# EAGLE board Jst_conv (EAGLE 9.6.2), part 1 of 2
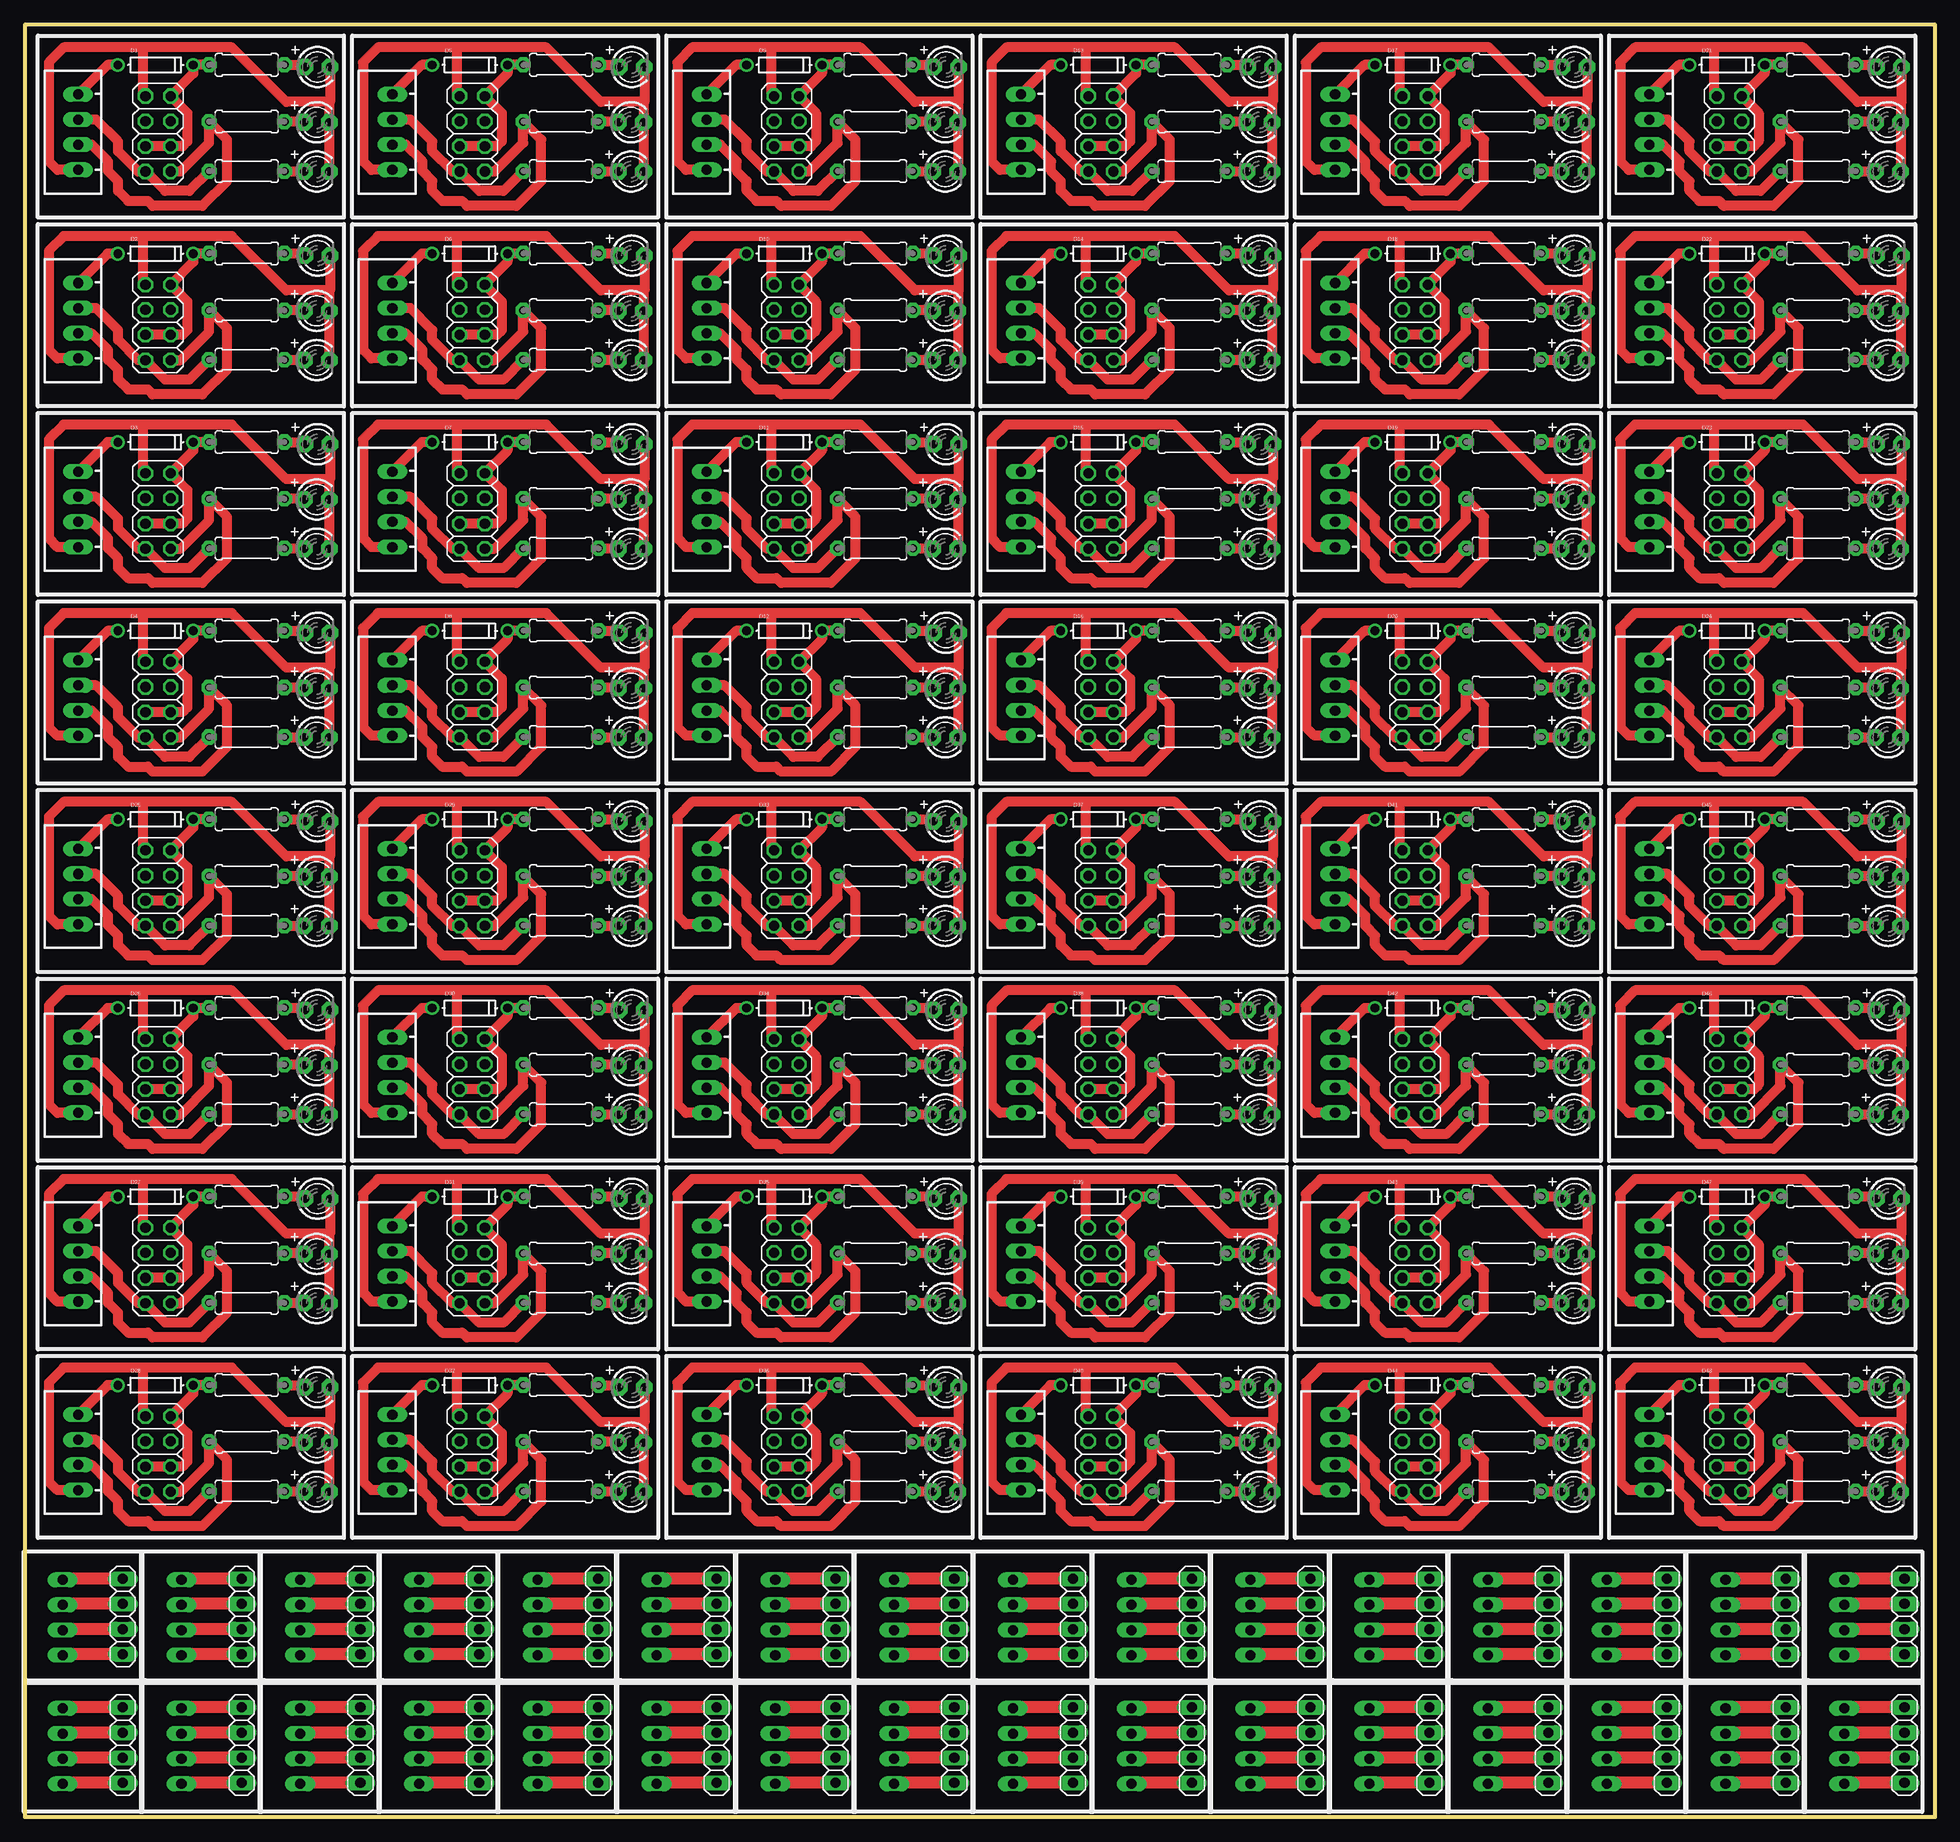
[diagram p0: board, top side]
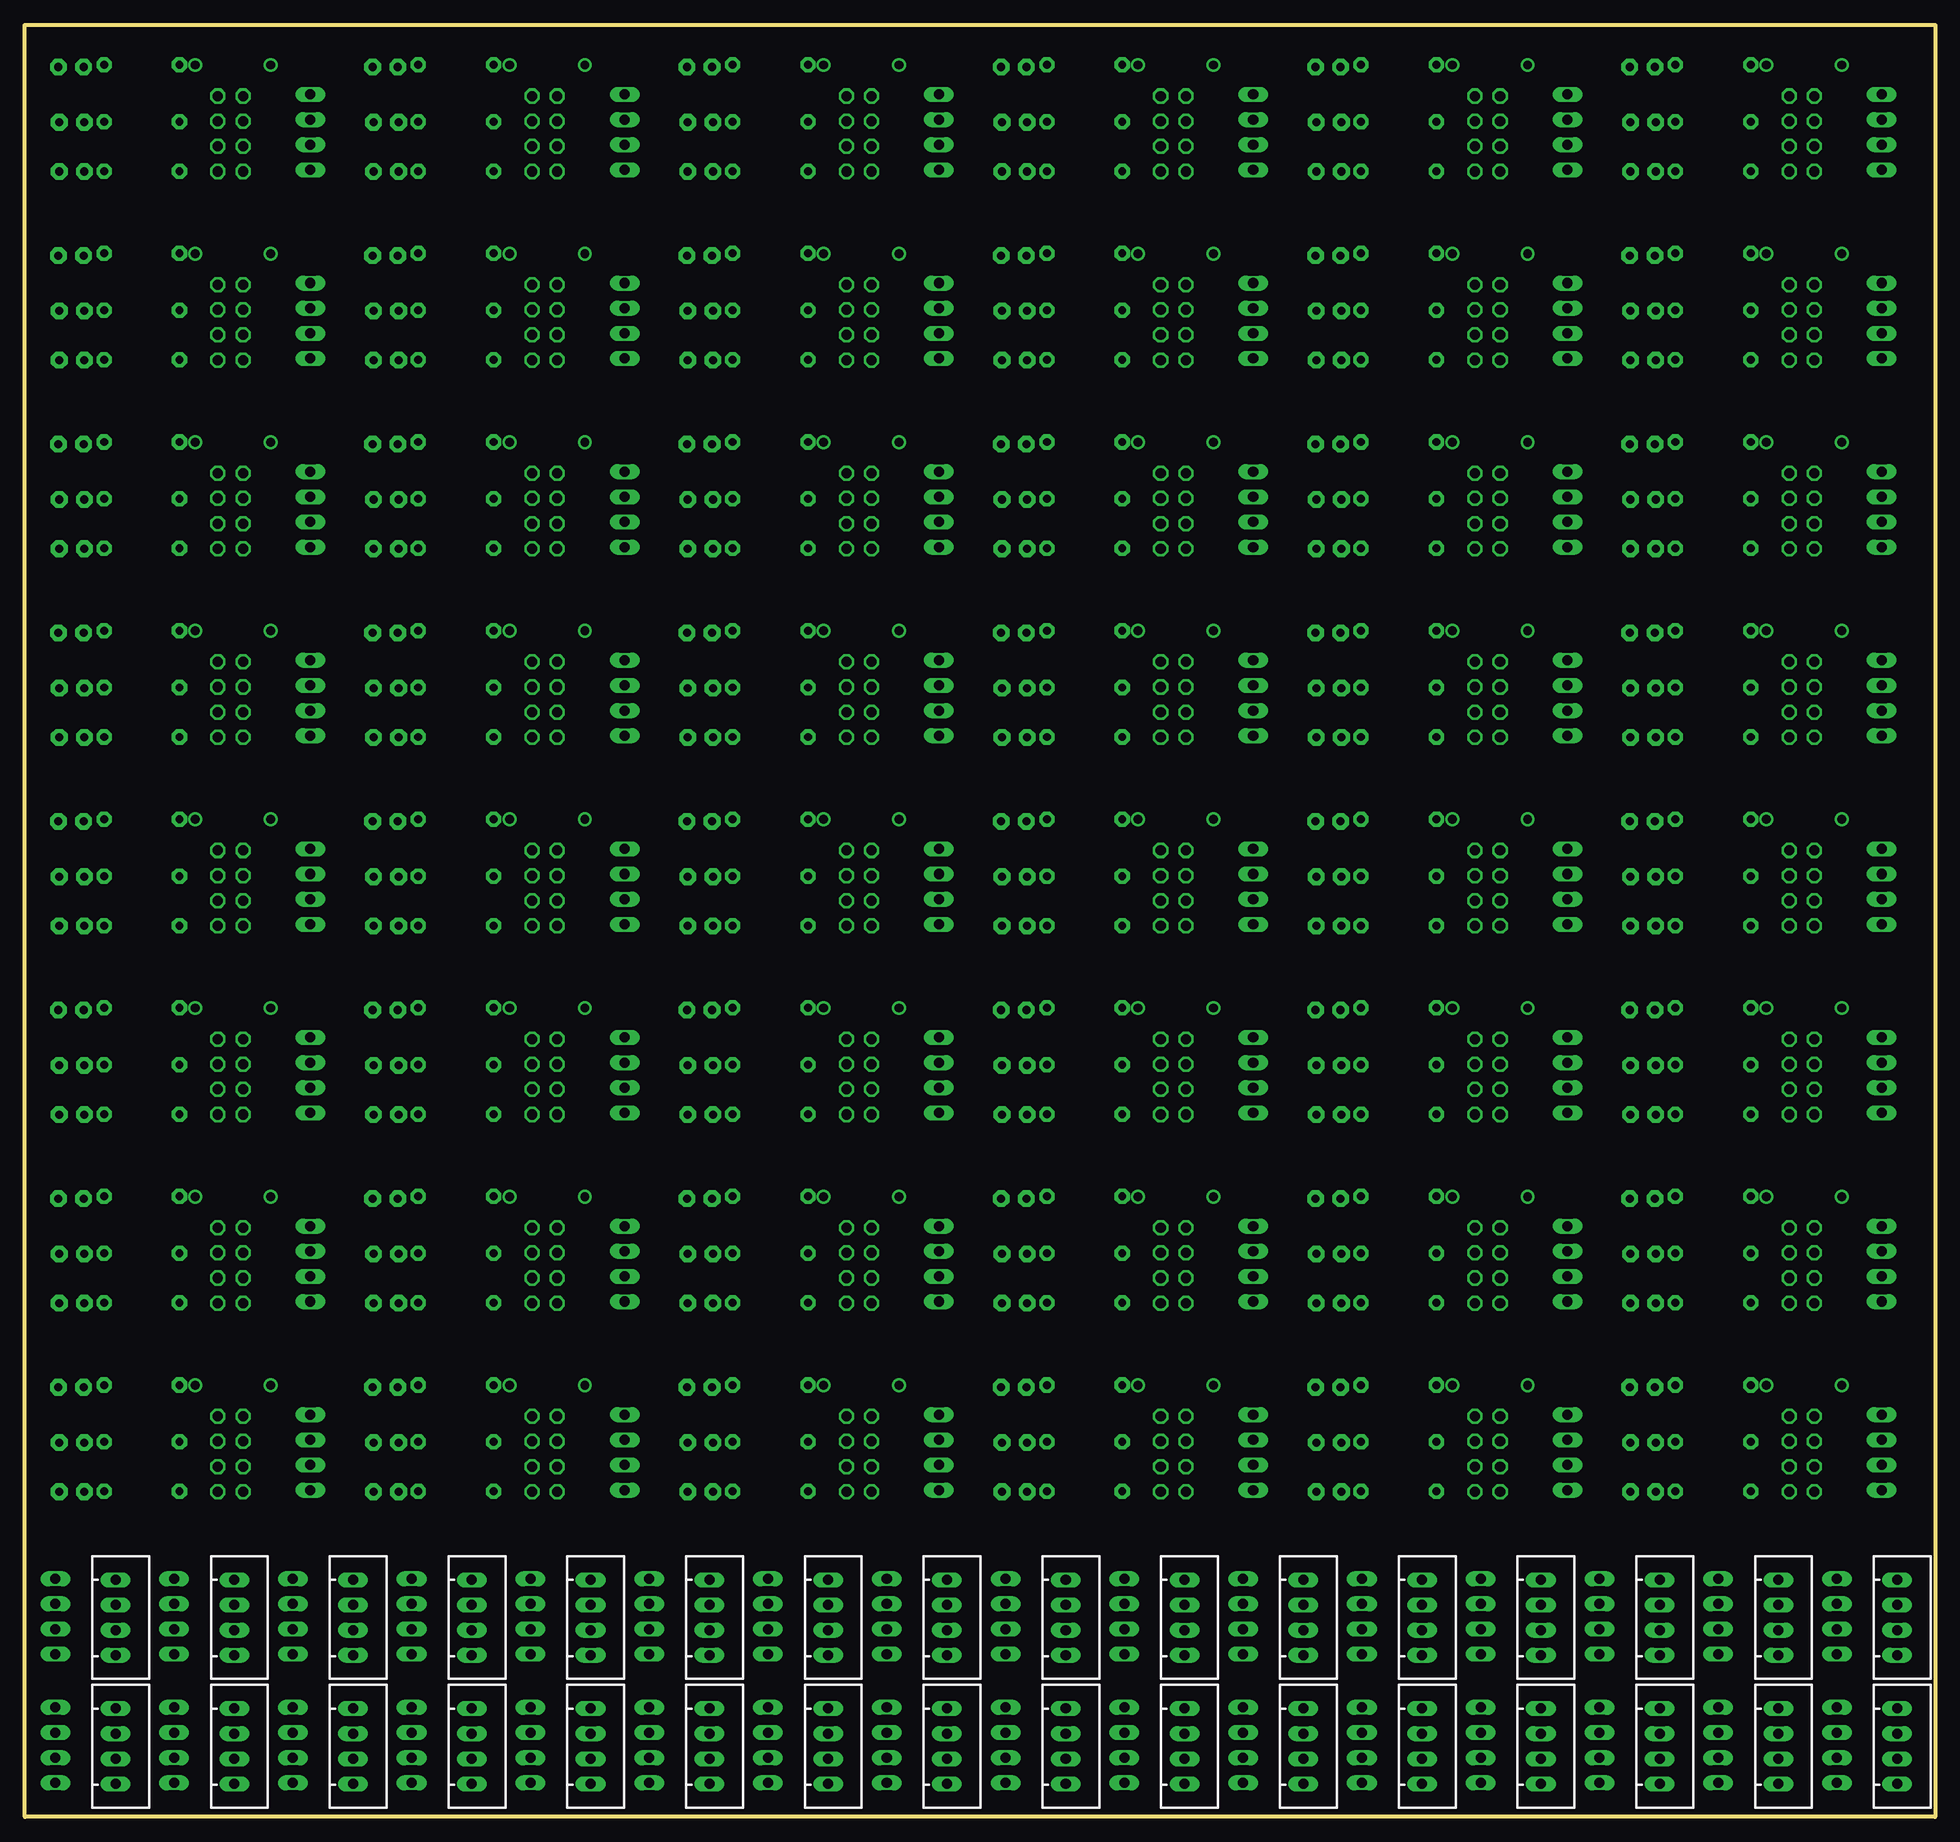
[diagram p1: board, bottom side, seen from below]

Size 193 x 181 mm. Coordinates in mm from the lower left corner, seen from the top.
Outline: 0,181 0,0 193,0 193,181 0,181
Copper layers (1*16): Top 0.035mm / dielectric 1.5mm / Bottom 0.035mm
Design rules "default": minimum track width 6mil, minimum drill 0.35mm, track to track 6mil, track to pad 6mil, pad to pad 6mil, via to via 6mil, smd to smd 6mil, copper to edge 40mil, drill to drill 6mil, minimum pad ring 10mil, minimum via ring 8mil, stop-mask expansion 4mil, vias tented up to drill 0mil, thermal gap 10mil

## Footprints (pad centres in the part's own frame; a part is rotated, then mirrored left to right if it is on the bottom)
DO-1N4148 = drill 0.9: A -3.81,0; C 3.81,0
2X04 = drill 1.016 octagon: 1 -3.81,-1.27; 2 -3.81,1.27; 3 -1.27,-1.27; 4 -1.27,1.27; 5 1.27,-1.27; 6 1.27,1.27; 7 3.81,-1.27; 8 3.81,1.27
1X04 = drill 1.016 long: 1 -3.81,0; 2 -1.27,0; 3 1.27,0; 4 3.81,0
LED3MM = drill 0.813 pad 1.676 octagon: A -1.27,0; K 1.27,0
0207/7 = drill 0.8 pad 1.524 octagon: 1 -3.81,0; 2 3.81,0
JST-XH-04-PACKAGE-LONG-PAD = drill 1.016 long: 1 -3.81,0; 2 -1.27,0; 3 1.27,0; 4 3.81,0

## Placement (x,y rotation side)
D1  [DO-1N4148]  13.22,176.94 0 top
D2  [DO-1N4148]  13.22,157.89 0 top
D3  [DO-1N4148]  13.22,138.84 0 top
D4  [DO-1N4148]  13.22,119.79 0 top
D5  [DO-1N4148]  44.97,176.94 0 top
D6  [DO-1N4148]  44.97,157.89 0 top
D7  [DO-1N4148]  44.97,138.84 0 top
D8  [DO-1N4148]  44.97,119.79 0 top
D9  [DO-1N4148]  76.72,176.94 0 top
D10  [DO-1N4148]  76.72,157.89 0 top
D11  [DO-1N4148]  76.72,138.84 0 top
D12  [DO-1N4148]  76.72,119.79 0 top
D13  [DO-1N4148]  108.47,176.94 0 top
D14  [DO-1N4148]  108.47,157.89 0 top
D15  [DO-1N4148]  108.47,138.84 0 top
D16  [DO-1N4148]  108.47,119.79 0 top
D17  [DO-1N4148]  140.22,176.94 0 top
D18  [DO-1N4148]  140.22,157.89 0 top
D19  [DO-1N4148]  140.22,138.84 0 top
D20  [DO-1N4148]  140.22,119.79 0 top
D21  [DO-1N4148]  171.97,176.94 0 top
D22  [DO-1N4148]  171.97,157.89 0 top
D23  [DO-1N4148]  171.97,138.84 0 top
D24  [DO-1N4148]  171.97,119.79 0 top
D25  [DO-1N4148]  13.22,100.74 0 top
D26  [DO-1N4148]  13.22,81.69 0 top
D27  [DO-1N4148]  13.22,62.64 0 top
D28  [DO-1N4148]  13.22,43.59 0 top
D29  [DO-1N4148]  44.97,100.74 0 top
D30  [DO-1N4148]  44.97,81.69 0 top
D31  [DO-1N4148]  44.97,62.64 0 top
D32  [DO-1N4148]  44.97,43.59 0 top
D33  [DO-1N4148]  76.72,100.74 0 top
D34  [DO-1N4148]  76.72,81.69 0 top
D35  [DO-1N4148]  76.72,62.64 0 top
D36  [DO-1N4148]  76.72,43.59 0 top
D37  [DO-1N4148]  108.47,100.74 0 top
D38  [DO-1N4148]  108.47,81.69 0 top
D39  [DO-1N4148]  108.47,62.64 0 top
D40  [DO-1N4148]  108.47,43.59 0 top
D41  [DO-1N4148]  140.22,100.74 0 top
D42  [DO-1N4148]  140.22,81.69 0 top
D43  [DO-1N4148]  140.22,62.64 0 top
D44  [DO-1N4148]  140.22,43.59 0 top
D45  [DO-1N4148]  171.97,100.74 0 top
D46  [DO-1N4148]  171.97,81.69 0 top
D47  [DO-1N4148]  171.97,62.64 0 top
D48  [DO-1N4148]  171.97,43.59 0 top
JP1  [2X04]  13.47,169.99 270 top
JP2  [2X04]  13.47,150.94 270 top
JP3  [2X04]  13.47,131.89 270 top
JP4  [2X04]  13.47,112.84 270 top
JP5  [2X04]  45.22,169.99 270 top
JP6  [2X04]  45.22,150.94 270 top
JP7  [2X04]  45.22,131.89 270 top
JP8  [2X04]  45.22,112.84 270 top
JP9  [2X04]  76.97,169.99 270 top
JP10  [2X04]  76.97,150.94 270 top
JP11  [2X04]  76.97,131.89 270 top
JP12  [2X04]  76.97,112.84 270 top
JP13  [2X04]  108.72,169.99 270 top
JP14  [2X04]  108.72,150.94 270 top
JP15  [2X04]  108.72,131.89 270 top
JP16  [2X04]  108.72,112.84 270 top
JP17  [2X04]  140.47,169.99 270 top
JP18  [2X04]  140.47,150.94 270 top
JP19  [2X04]  140.47,131.89 270 top
JP20  [2X04]  140.47,112.84 270 top
JP21  [2X04]  172.22,169.99 270 top
JP22  [2X04]  172.22,150.94 270 top
JP23  [2X04]  172.22,131.89 270 top
JP24  [2X04]  172.22,112.84 270 top
JP25  [2X04]  13.47,93.79 270 top
JP26  [2X04]  13.47,74.74 270 top
JP27  [2X04]  13.47,55.69 270 top
JP28  [2X04]  13.47,36.64 270 top
JP29  [2X04]  45.22,93.79 270 top
JP30  [2X04]  45.22,74.74 270 top
JP31  [2X04]  45.22,55.69 270 top
JP32  [2X04]  45.22,36.64 270 top
JP33  [2X04]  76.97,93.79 270 top
JP34  [2X04]  76.97,74.74 270 top
JP35  [2X04]  76.97,55.69 270 top
JP36  [2X04]  76.97,36.64 270 top
JP37  [2X04]  108.72,93.79 270 top
JP38  [2X04]  108.72,74.74 270 top
JP39  [2X04]  108.72,55.69 270 top
JP40  [2X04]  108.72,36.64 270 top
JP41  [2X04]  140.47,93.79 270 top
JP42  [2X04]  140.47,74.74 270 top
JP43  [2X04]  140.47,55.69 270 top
JP44  [2X04]  140.47,36.64 270 top
JP45  [2X04]  172.22,93.79 270 top
JP46  [2X04]  172.22,74.74 270 top
JP47  [2X04]  172.22,55.69 270 top
JP48  [2X04]  172.22,36.64 270 top
JP49  [1X04]  9.91,20.23 270 top
JP50  [1X04]  21.91,20.23 270 top
JP51  [1X04]  33.91,20.23 270 top
JP52  [1X04]  45.91,20.23 270 top
JP53  [1X04]  9.91,7.23 270 top
JP54  [1X04]  21.91,7.23 270 top
JP55  [1X04]  33.91,7.23 270 top
JP56  [1X04]  45.91,7.23 270 top
JP57  [1X04]  57.91,20.23 270 top
JP58  [1X04]  69.91,20.23 270 top
JP59  [1X04]  81.91,20.23 270 top
JP60  [1X04]  93.91,20.23 270 top
JP61  [1X04]  57.91,7.23 270 top
JP62  [1X04]  69.91,7.23 270 top
JP63  [1X04]  81.91,7.23 270 top
JP64  [1X04]  93.91,7.23 270 top
JP65  [1X04]  105.91,20.23 270 top
JP66  [1X04]  117.91,20.23 270 top
JP67  [1X04]  129.91,20.23 270 top
JP68  [1X04]  141.91,20.23 270 top
JP69  [1X04]  105.91,7.23 270 top
JP70  [1X04]  117.91,7.23 270 top
JP71  [1X04]  129.91,7.23 270 top
JP72  [1X04]  141.91,7.23 270 top
JP73  [1X04]  153.91,20.23 270 top
JP74  [1X04]  165.91,20.23 270 top
JP75  [1X04]  177.91,20.23 270 top
JP76  [1X04]  189.91,20.23 270 top
JP77  [1X04]  153.91,7.23 270 top
JP78  [1X04]  165.91,7.23 270 top
JP79  [1X04]  177.91,7.23 270 top
JP80  [1X04]  189.91,7.23 270 top
LED1  [LED3MM]  29.5,171.15 0 top
LED2  [LED3MM]  29.5,166.18 0 top
LED3  [LED3MM]  29.58,176.74 0 top
LED4  [LED3MM]  29.5,152.1 0 top
LED5  [LED3MM]  29.5,147.13 0 top
LED6  [LED3MM]  29.58,157.69 0 top
LED7  [LED3MM]  29.5,133.05 0 top
LED8  [LED3MM]  29.5,128.08 0 top
LED9  [LED3MM]  29.58,138.63 0 top
LED10  [LED3MM]  29.5,114 0 top
LED11  [LED3MM]  29.5,109.03 0 top
LED12  [LED3MM]  29.58,119.59 0 top
LED13  [LED3MM]  61.25,171.15 0 top
LED14  [LED3MM]  61.25,166.18 0 top
LED15  [LED3MM]  61.33,176.74 0 top
LED16  [LED3MM]  61.25,152.1 0 top
LED17  [LED3MM]  61.25,147.13 0 top
LED18  [LED3MM]  61.33,157.69 0 top
LED19  [LED3MM]  61.25,133.05 0 top
LED20  [LED3MM]  61.25,128.08 0 top
LED21  [LED3MM]  61.33,138.63 0 top
LED22  [LED3MM]  61.25,114 0 top
LED23  [LED3MM]  61.25,109.03 0 top
LED24  [LED3MM]  61.33,119.59 0 top
LED25  [LED3MM]  93,171.15 0 top
LED26  [LED3MM]  93,166.18 0 top
LED27  [LED3MM]  93.08,176.74 0 top
LED28  [LED3MM]  93,152.1 0 top
LED29  [LED3MM]  93,147.13 0 top
LED30  [LED3MM]  93.08,157.69 0 top
LED31  [LED3MM]  93,133.05 0 top
LED32  [LED3MM]  93,128.08 0 top
LED33  [LED3MM]  93.08,138.63 0 top
LED34  [LED3MM]  93,114 0 top
LED35  [LED3MM]  93,109.03 0 top
LED36  [LED3MM]  93.08,119.59 0 top
LED37  [LED3MM]  124.75,171.15 0 top
LED38  [LED3MM]  124.75,166.18 0 top
LED39  [LED3MM]  124.83,176.74 0 top
LED40  [LED3MM]  124.75,152.1 0 top
LED41  [LED3MM]  124.75,147.13 0 top
LED42  [LED3MM]  124.83,157.69 0 top
LED43  [LED3MM]  124.75,133.05 0 top
LED44  [LED3MM]  124.75,128.08 0 top
LED45  [LED3MM]  124.83,138.63 0 top
LED46  [LED3MM]  124.75,114 0 top
LED47  [LED3MM]  124.75,109.03 0 top
LED48  [LED3MM]  124.83,119.59 0 top
LED49  [LED3MM]  156.5,171.15 0 top
LED50  [LED3MM]  156.5,166.18 0 top
LED51  [LED3MM]  156.58,176.74 0 top
LED52  [LED3MM]  156.5,152.1 0 top
LED53  [LED3MM]  156.5,147.13 0 top
LED54  [LED3MM]  156.58,157.69 0 top
LED55  [LED3MM]  156.5,133.05 0 top
LED56  [LED3MM]  156.5,128.08 0 top
LED57  [LED3MM]  156.58,138.63 0 top
LED58  [LED3MM]  156.5,114 0 top
LED59  [LED3MM]  156.5,109.03 0 top
LED60  [LED3MM]  156.58,119.59 0 top
LED61  [LED3MM]  188.25,171.15 0 top
LED62  [LED3MM]  188.25,166.18 0 top
LED63  [LED3MM]  188.33,176.74 0 top
LED64  [LED3MM]  188.25,152.1 0 top
LED65  [LED3MM]  188.25,147.13 0 top
LED66  [LED3MM]  188.33,157.69 0 top
LED67  [LED3MM]  188.25,133.05 0 top
LED68  [LED3MM]  188.25,128.08 0 top
LED69  [LED3MM]  188.33,138.63 0 top
LED70  [LED3MM]  188.25,114 0 top
LED71  [LED3MM]  188.25,109.03 0 top
LED72  [LED3MM]  188.33,119.59 0 top
LED73  [LED3MM]  29.5,94.95 0 top
LED74  [LED3MM]  29.5,89.98 0 top
LED75  [LED3MM]  29.58,100.53 0 top
LED76  [LED3MM]  29.5,75.9 0 top
LED77  [LED3MM]  29.5,70.93 0 top
LED78  [LED3MM]  29.58,81.48 0 top
LED79  [LED3MM]  29.5,56.85 0 top
LED80  [LED3MM]  29.5,51.88 0 top
LED81  [LED3MM]  29.58,62.44 0 top
LED82  [LED3MM]  29.5,37.8 0 top
LED83  [LED3MM]  29.5,32.83 0 top
LED84  [LED3MM]  29.58,43.38 0 top
LED85  [LED3MM]  61.25,94.95 0 top
LED86  [LED3MM]  61.25,89.98 0 top
LED87  [LED3MM]  61.33,100.53 0 top
LED88  [LED3MM]  61.25,75.9 0 top
LED89  [LED3MM]  61.25,70.93 0 top
LED90  [LED3MM]  61.33,81.48 0 top
LED91  [LED3MM]  61.25,56.85 0 top
LED92  [LED3MM]  61.25,51.88 0 top
LED93  [LED3MM]  61.33,62.44 0 top
LED94  [LED3MM]  61.25,37.8 0 top
LED95  [LED3MM]  61.25,32.83 0 top
LED96  [LED3MM]  61.33,43.38 0 top
LED97  [LED3MM]  93,94.95 0 top
LED98  [LED3MM]  93,89.98 0 top
LED99  [LED3MM]  93.08,100.53 0 top
LED100  [LED3MM]  93,75.9 0 top
LED101  [LED3MM]  93,70.93 0 top
LED102  [LED3MM]  93.08,81.48 0 top
LED103  [LED3MM]  93,56.85 0 top
LED104  [LED3MM]  93,51.88 0 top
LED105  [LED3MM]  93.08,62.44 0 top
LED106  [LED3MM]  93,37.8 0 top
LED107  [LED3MM]  93,32.83 0 top
LED108  [LED3MM]  93.08,43.38 0 top
LED109  [LED3MM]  124.75,94.95 0 top
LED110  [LED3MM]  124.75,89.98 0 top
LED111  [LED3MM]  124.83,100.53 0 top
LED112  [LED3MM]  124.75,75.9 0 top
LED113  [LED3MM]  124.75,70.93 0 top
LED114  [LED3MM]  124.83,81.48 0 top
LED115  [LED3MM]  124.75,56.85 0 top
LED116  [LED3MM]  124.75,51.88 0 top
LED117  [LED3MM]  124.83,62.44 0 top
LED118  [LED3MM]  124.75,37.8 0 top
LED119  [LED3MM]  124.75,32.83 0 top
LED120  [LED3MM]  124.83,43.38 0 top
LED121  [LED3MM]  156.5,94.95 0 top
LED122  [LED3MM]  156.5,89.98 0 top
LED123  [LED3MM]  156.58,100.53 0 top
LED124  [LED3MM]  156.5,75.9 0 top
LED125  [LED3MM]  156.5,70.93 0 top
LED126  [LED3MM]  156.58,81.48 0 top
LED127  [LED3MM]  156.5,56.85 0 top
LED128  [LED3MM]  156.5,51.88 0 top
LED129  [LED3MM]  156.58,62.44 0 top
LED130  [LED3MM]  156.5,37.8 0 top
LED131  [LED3MM]  156.5,32.83 0 top
LED132  [LED3MM]  156.58,43.38 0 top
LED133  [LED3MM]  188.25,94.95 0 top
LED134  [LED3MM]  188.25,89.98 0 top
LED135  [LED3MM]  188.33,100.53 0 top
LED136  [LED3MM]  188.25,75.9 0 top
LED137  [LED3MM]  188.25,70.93 0 top
LED138  [LED3MM]  188.33,81.48 0 top
LED139  [LED3MM]  188.25,56.85 0 top
LED140  [LED3MM]  188.25,51.88 0 top
LED141  [LED3MM]  188.33,62.44 0 top
LED142  [LED3MM]  188.25,37.8 0 top
LED143  [LED3MM]  188.25,32.83 0 top
LED144  [LED3MM]  188.33,43.38 0 top
R1  [0207/7]  22.43,152.16 180 top
R2  [0207/7]  22.43,157.91 180 top
R3  [0207/7]  22.43,147.16 180 top
R4  [0207/7]  22.43,171.21 180 top
R5  [0207/7]  22.43,176.96 180 top
R6  [0207/7]  22.43,166.21 180 top
R7  [0207/7]  22.43,133.11 180 top
R8  [0207/7]  22.43,138.86 180 top
R9  [0207/7]  22.43,128.11 180 top
R10  [0207/7]  22.43,114.06 180 top
R11  [0207/7]  22.43,119.81 180 top
R12  [0207/7]  22.43,109.06 180 top
R13  [0207/7]  54.18,171.21 180 top
R14  [0207/7]  54.18,176.96 180 top
R15  [0207/7]  54.18,166.21 180 top
R16  [0207/7]  54.18,152.16 180 top
R17  [0207/7]  54.18,157.91 180 top
R18  [0207/7]  54.18,147.16 180 top
R19  [0207/7]  54.18,133.11 180 top
R20  [0207/7]  54.18,138.86 180 top
R21  [0207/7]  54.18,128.11 180 top
R22  [0207/7]  54.18,114.06 180 top
R23  [0207/7]  54.18,119.81 180 top
R24  [0207/7]  54.18,109.06 180 top
R25  [0207/7]  85.93,171.21 180 top
R26  [0207/7]  85.93,176.96 180 top
R27  [0207/7]  85.93,166.21 180 top
R28  [0207/7]  85.93,152.16 180 top
R29  [0207/7]  85.93,157.91 180 top
R30  [0207/7]  85.93,147.16 180 top
R31  [0207/7]  85.93,133.11 180 top
R32  [0207/7]  85.93,138.86 180 top
R33  [0207/7]  85.93,128.11 180 top
R34  [0207/7]  85.93,114.06 180 top
R35  [0207/7]  85.93,119.81 180 top
R36  [0207/7]  85.93,109.06 180 top
R37  [0207/7]  117.68,171.21 180 top
R38  [0207/7]  117.68,176.96 180 top
R39  [0207/7]  117.68,166.21 180 top
R40  [0207/7]  117.68,152.16 180 top
R41  [0207/7]  117.68,157.91 180 top
R42  [0207/7]  117.68,147.16 180 top
R43  [0207/7]  117.68,133.11 180 top
R44  [0207/7]  117.68,138.86 180 top
R45  [0207/7]  117.68,128.11 180 top
R46  [0207/7]  117.68,114.06 180 top
R47  [0207/7]  117.68,119.81 180 top
R48  [0207/7]  117.68,109.06 180 top
R49  [0207/7]  149.43,171.21 180 top
R50  [0207/7]  149.43,176.96 180 top
R51  [0207/7]  149.43,166.21 180 top
R52  [0207/7]  149.43,152.16 180 top
R53  [0207/7]  149.43,157.91 180 top
R54  [0207/7]  149.43,147.16 180 top
R55  [0207/7]  149.43,133.11 180 top
R56  [0207/7]  149.43,138.86 180 top
R57  [0207/7]  149.43,128.11 180 top
R58  [0207/7]  149.43,114.06 180 top
R59  [0207/7]  149.43,119.81 180 top
R60  [0207/7]  149.43,109.06 180 top
R61  [0207/7]  181.18,171.21 180 top
R62  [0207/7]  181.18,176.96 180 top
R63  [0207/7]  181.18,166.21 180 top
R64  [0207/7]  181.18,152.16 180 top
R65  [0207/7]  181.18,157.91 180 top
R66  [0207/7]  181.18,147.16 180 top
R67  [0207/7]  181.18,133.11 180 top
R68  [0207/7]  181.18,138.86 180 top
R69  [0207/7]  181.18,128.11 180 top
R70  [0207/7]  181.18,114.06 180 top
R71  [0207/7]  181.18,119.81 180 top
R72  [0207/7]  181.18,109.06 180 top
R73  [0207/7]  22.43,95.01 180 top
R74  [0207/7]  22.43,100.76 180 top
R75  [0207/7]  22.43,90.01 180 top
R76  [0207/7]  22.43,75.96 180 top
R77  [0207/7]  22.43,81.71 180 top
R78  [0207/7]  22.43,70.96 180 top
R79  [0207/7]  22.43,56.91 180 top
R80  [0207/7]  22.43,62.66 180 top
R81  [0207/7]  22.43,51.91 180 top
R82  [0207/7]  22.43,37.86 180 top
R83  [0207/7]  22.43,43.61 180 top
R84  [0207/7]  22.43,32.86 180 top
R85  [0207/7]  54.18,95.01 180 top
R86  [0207/7]  54.18,100.76 180 top
R87  [0207/7]  54.18,90.01 180 top
R88  [0207/7]  54.18,75.96 180 top
R89  [0207/7]  54.18,81.71 180 top
R90  [0207/7]  54.18,70.96 180 top
R91  [0207/7]  54.18,56.91 180 top
R92  [0207/7]  54.18,62.66 180 top
R93  [0207/7]  54.18,51.91 180 top
R94  [0207/7]  54.18,37.86 180 top
R95  [0207/7]  54.18,43.61 180 top
R96  [0207/7]  54.18,32.86 180 top
R97  [0207/7]  85.93,95.01 180 top
R98  [0207/7]  85.93,100.76 180 top
R99  [0207/7]  85.93,90.01 180 top
R100  [0207/7]  85.93,75.96 180 top
R101  [0207/7]  85.93,81.71 180 top
R102  [0207/7]  85.93,70.96 180 top
R103  [0207/7]  85.93,56.91 180 top
R104  [0207/7]  85.93,62.66 180 top
R105  [0207/7]  85.93,51.91 180 top
R106  [0207/7]  85.93,37.86 180 top
R107  [0207/7]  85.93,43.61 180 top
R108  [0207/7]  85.93,32.86 180 top
R109  [0207/7]  117.68,95.01 180 top
R110  [0207/7]  117.68,100.76 180 top
R111  [0207/7]  117.68,90.01 180 top
R112  [0207/7]  117.68,75.96 180 top
R113  [0207/7]  117.68,81.71 180 top
R114  [0207/7]  117.68,70.96 180 top
R115  [0207/7]  117.68,56.91 180 top
R116  [0207/7]  117.68,62.66 180 top
R117  [0207/7]  117.68,51.91 180 top
R118  [0207/7]  117.68,37.86 180 top
R119  [0207/7]  117.68,43.61 180 top
R120  [0207/7]  117.68,32.86 180 top
R121  [0207/7]  149.43,95.01 180 top
R122  [0207/7]  149.43,100.76 180 top
R123  [0207/7]  149.43,90.01 180 top
R124  [0207/7]  149.43,75.96 180 top
R125  [0207/7]  149.43,81.71 180 top
R126  [0207/7]  149.43,70.96 180 top
R127  [0207/7]  149.43,56.91 180 top
R128  [0207/7]  149.43,62.66 180 top
R129  [0207/7]  149.43,51.91 180 top
R130  [0207/7]  149.43,37.86 180 top
R131  [0207/7]  149.43,43.61 180 top
R132  [0207/7]  149.43,32.86 180 top
R133  [0207/7]  181.18,95.01 180 top
R134  [0207/7]  181.18,100.76 180 top
R135  [0207/7]  181.18,90.01 180 top
R136  [0207/7]  181.18,75.96 180 top
R137  [0207/7]  181.18,81.71 180 top
R138  [0207/7]  181.18,70.96 180 top
R139  [0207/7]  181.18,56.91 180 top
R140  [0207/7]  181.18,62.66 180 top
R141  [0207/7]  181.18,51.91 180 top
R142  [0207/7]  181.18,37.86 180 top
R143  [0207/7]  181.18,43.61 180 top
R144  [0207/7]  181.18,32.86 180 top
X1  JST-XH-04-PIN-LONG-PAD  [JST-XH-04-PACKAGE-LONG-PAD]  5.39,170.15 90 top
X2  JST-XH-04-PIN-LONG-PAD  [JST-XH-04-PACKAGE-LONG-PAD]  5.39,151.1 90 top
X3  JST-XH-04-PIN-LONG-PAD  [JST-XH-04-PACKAGE-LONG-PAD]  5.39,132.05 90 top
X4  JST-XH-04-PIN-LONG-PAD  [JST-XH-04-PACKAGE-LONG-PAD]  5.39,113 90 top
X5  JST-XH-04-PIN-LONG-PAD  [JST-XH-04-PACKAGE-LONG-PAD]  37.14,170.15 90 top
X6  JST-XH-04-PIN-LONG-PAD  [JST-XH-04-PACKAGE-LONG-PAD]  37.14,151.1 90 top
X7  JST-XH-04-PIN-LONG-PAD  [JST-XH-04-PACKAGE-LONG-PAD]  37.14,132.05 90 top
X8  JST-XH-04-PIN-LONG-PAD  [JST-XH-04-PACKAGE-LONG-PAD]  37.14,113 90 top
X9  JST-XH-04-PIN-LONG-PAD  [JST-XH-04-PACKAGE-LONG-PAD]  68.89,170.15 90 top
X10  JST-XH-04-PIN-LONG-PAD  [JST-XH-04-PACKAGE-LONG-PAD]  68.89,151.1 90 top
X11  JST-XH-04-PIN-LONG-PAD  [JST-XH-04-PACKAGE-LONG-PAD]  68.89,132.05 90 top
X12  JST-XH-04-PIN-LONG-PAD  [JST-XH-04-PACKAGE-LONG-PAD]  68.89,113 90 top
X13  JST-XH-04-PIN-LONG-PAD  [JST-XH-04-PACKAGE-LONG-PAD]  100.64,170.15 90 top
X14  JST-XH-04-PIN-LONG-PAD  [JST-XH-04-PACKAGE-LONG-PAD]  100.64,151.1 90 top
X15  JST-XH-04-PIN-LONG-PAD  [JST-XH-04-PACKAGE-LONG-PAD]  100.64,132.05 90 top
X16  JST-XH-04-PIN-LONG-PAD  [JST-XH-04-PACKAGE-LONG-PAD]  100.64,113 90 top
X17  JST-XH-04-PIN-LONG-PAD  [JST-XH-04-PACKAGE-LONG-PAD]  132.39,170.15 90 top
X18  JST-XH-04-PIN-LONG-PAD  [JST-XH-04-PACKAGE-LONG-PAD]  132.39,151.1 90 top
X19  JST-XH-04-PIN-LONG-PAD  [JST-XH-04-PACKAGE-LONG-PAD]  132.39,132.05 90 top
X20  JST-XH-04-PIN-LONG-PAD  [JST-XH-04-PACKAGE-LONG-PAD]  132.39,113 90 top
X21  JST-XH-04-PIN-LONG-PAD  [JST-XH-04-PACKAGE-LONG-PAD]  164.14,170.15 90 top
X22  JST-XH-04-PIN-LONG-PAD  [JST-XH-04-PACKAGE-LONG-PAD]  164.14,151.1 90 top
X23  JST-XH-04-PIN-LONG-PAD  [JST-XH-04-PACKAGE-LONG-PAD]  164.14,132.05 90 top
X24  JST-XH-04-PIN-LONG-PAD  [JST-XH-04-PACKAGE-LONG-PAD]  164.14,113 90 top
X25  JST-XH-04-PIN-LONG-PAD  [JST-XH-04-PACKAGE-LONG-PAD]  5.39,93.95 90 top
X26  JST-XH-04-PIN-LONG-PAD  [JST-XH-04-PACKAGE-LONG-PAD]  5.39,74.9 90 top
X27  JST-XH-04-PIN-LONG-PAD  [JST-XH-04-PACKAGE-LONG-PAD]  5.39,55.85 90 top
X28  JST-XH-04-PIN-LONG-PAD  [JST-XH-04-PACKAGE-LONG-PAD]  5.39,36.8 90 top
X29  JST-XH-04-PIN-LONG-PAD  [JST-XH-04-PACKAGE-LONG-PAD]  37.14,93.95 90 top
X30  JST-XH-04-PIN-LONG-PAD  [JST-XH-04-PACKAGE-LONG-PAD]  37.14,74.9 90 top
X31  JST-XH-04-PIN-LONG-PAD  [JST-XH-04-PACKAGE-LONG-PAD]  37.14,55.85 90 top
X32  JST-XH-04-PIN-LONG-PAD  [JST-XH-04-PACKAGE-LONG-PAD]  37.14,36.8 90 top
X33  JST-XH-04-PIN-LONG-PAD  [JST-XH-04-PACKAGE-LONG-PAD]  68.89,93.95 90 top
X34  JST-XH-04-PIN-LONG-PAD  [JST-XH-04-PACKAGE-LONG-PAD]  68.89,74.9 90 top
X35  JST-XH-04-PIN-LONG-PAD  [JST-XH-04-PACKAGE-LONG-PAD]  68.89,55.85 90 top
X36  JST-XH-04-PIN-LONG-PAD  [JST-XH-04-PACKAGE-LONG-PAD]  68.89,36.8 90 top
X37  JST-XH-04-PIN-LONG-PAD  [JST-XH-04-PACKAGE-LONG-PAD]  100.64,93.95 90 top
X38  JST-XH-04-PIN-LONG-PAD  [JST-XH-04-PACKAGE-LONG-PAD]  100.64,74.9 90 top
X39  JST-XH-04-PIN-LONG-PAD  [JST-XH-04-PACKAGE-LONG-PAD]  100.64,55.85 90 top
X40  JST-XH-04-PIN-LONG-PAD  [JST-XH-04-PACKAGE-LONG-PAD]  100.64,36.8 90 top
X41  JST-XH-04-PIN-LONG-PAD  [JST-XH-04-PACKAGE-LONG-PAD]  132.39,93.95 90 top
X42  JST-XH-04-PIN-LONG-PAD  [JST-XH-04-PACKAGE-LONG-PAD]  132.39,74.9 90 top
X43  JST-XH-04-PIN-LONG-PAD  [JST-XH-04-PACKAGE-LONG-PAD]  132.39,55.85 90 top
X44  JST-XH-04-PIN-LONG-PAD  [JST-XH-04-PACKAGE-LONG-PAD]  132.39,36.8 90 top
X45  JST-XH-04-PIN-LONG-PAD  [JST-XH-04-PACKAGE-LONG-PAD]  164.14,93.95 90 top
X46  JST-XH-04-PIN-LONG-PAD  [JST-XH-04-PACKAGE-LONG-PAD]  164.14,74.9 90 top
X47  JST-XH-04-PIN-LONG-PAD  [JST-XH-04-PACKAGE-LONG-PAD]  164.14,55.85 90 top
X48  JST-XH-04-PIN-LONG-PAD  [JST-XH-04-PACKAGE-LONG-PAD]  164.14,36.8 90 top
X49  JST-XH-04-PIN-LONG-PAD  [JST-XH-04-PACKAGE-LONG-PAD]  3.83,20.13 270 bottom
X50  JST-XH-04-PIN-LONG-PAD  [JST-XH-04-PACKAGE-LONG-PAD]  15.83,20.13 270 bottom
X51  JST-XH-04-PIN-LONG-PAD  [JST-XH-04-PACKAGE-LONG-PAD]  27.83,20.13 270 bottom
X52  JST-XH-04-PIN-LONG-PAD  [JST-XH-04-PACKAGE-LONG-PAD]  39.83,20.13 270 bottom
X53  JST-XH-04-PIN-LONG-PAD  [JST-XH-04-PACKAGE-LONG-PAD]  3.83,7.13 270 bottom
X54  JST-XH-04-PIN-LONG-PAD  [JST-XH-04-PACKAGE-LONG-PAD]  15.83,7.13 270 bottom
X55  JST-XH-04-PIN-LONG-PAD  [JST-XH-04-PACKAGE-LONG-PAD]  27.83,7.13 270 bottom
X56  JST-XH-04-PIN-LONG-PAD  [JST-XH-04-PACKAGE-LONG-PAD]  39.83,7.13 270 bottom
X57  JST-XH-04-PIN-LONG-PAD  [JST-XH-04-PACKAGE-LONG-PAD]  51.83,20.13 270 bottom
X58  JST-XH-04-PIN-LONG-PAD  [JST-XH-04-PACKAGE-LONG-PAD]  63.83,20.13 270 bottom
X59  JST-XH-04-PIN-LONG-PAD  [JST-XH-04-PACKAGE-LONG-PAD]  75.83,20.13 270 bottom
X60  JST-XH-04-PIN-LONG-PAD  [JST-XH-04-PACKAGE-LONG-PAD]  87.83,20.13 270 bottom
X61  JST-XH-04-PIN-LONG-PAD  [JST-XH-04-PACKAGE-LONG-PAD]  51.83,7.13 270 bottom
X62  JST-XH-04-PIN-LONG-PAD  [JST-XH-04-PACKAGE-LONG-PAD]  63.83,7.13 270 bottom
X63  JST-XH-04-PIN-LONG-PAD  [JST-XH-04-PACKAGE-LONG-PAD]  75.83,7.13 270 bottom
X64  JST-XH-04-PIN-LONG-PAD  [JST-XH-04-PACKAGE-LONG-PAD]  87.83,7.13 270 bottom
X65  JST-XH-04-PIN-LONG-PAD  [JST-XH-04-PACKAGE-LONG-PAD]  99.83,20.13 270 bottom
X66  JST-XH-04-PIN-LONG-PAD  [JST-XH-04-PACKAGE-LONG-PAD]  111.83,20.13 270 bottom
X67  JST-XH-04-PIN-LONG-PAD  [JST-XH-04-PACKAGE-LONG-PAD]  123.83,20.13 270 bottom
X68  JST-XH-04-PIN-LONG-PAD  [JST-XH-04-PACKAGE-LONG-PAD]  135.83,20.13 270 bottom
X69  JST-XH-04-PIN-LONG-PAD  [JST-XH-04-PACKAGE-LONG-PAD]  99.83,7.13 270 bottom
X70  JST-XH-04-PIN-LONG-PAD  [JST-XH-04-PACKAGE-LONG-PAD]  111.83,7.13 270 bottom
X71  JST-XH-04-PIN-LONG-PAD  [JST-XH-04-PACKAGE-LONG-PAD]  123.83,7.13 270 bottom
X72  JST-XH-04-PIN-LONG-PAD  [JST-XH-04-PACKAGE-LONG-PAD]  135.83,7.13 270 bottom
X73  JST-XH-04-PIN-LONG-PAD  [JST-XH-04-PACKAGE-LONG-PAD]  147.83,20.13 270 bottom
X74  JST-XH-04-PIN-LONG-PAD  [JST-XH-04-PACKAGE-LONG-PAD]  159.83,20.13 270 bottom
X75  JST-XH-04-PIN-LONG-PAD  [JST-XH-04-PACKAGE-LONG-PAD]  171.83,20.13 270 bottom
X76  JST-XH-04-PIN-LONG-PAD  [JST-XH-04-PACKAGE-LONG-PAD]  183.83,20.13 270 bottom
X77  JST-XH-04-PIN-LONG-PAD  [JST-XH-04-PACKAGE-LONG-PAD]  147.83,7.13 270 bottom
X78  JST-XH-04-PIN-LONG-PAD  [JST-XH-04-PACKAGE-LONG-PAD]  159.83,7.13 270 bottom
X79  JST-XH-04-PIN-LONG-PAD  [JST-XH-04-PACKAGE-LONG-PAD]  171.83,7.13 270 bottom
X80  JST-XH-04-PIN-LONG-PAD  [JST-XH-04-PACKAGE-LONG-PAD]  183.83,7.13 270 bottom

## Library data of the parts
D1-D48 LED1-LED144 = adafruit
JP1-JP80 = pinhead
R1-R144 = Clean-Kong
X1-X80 = JST

## Nets
A: JP1.7 R6.2 X1.3
A1: JP2.7 R3.2 X2.3
A2: JP3.7 R9.2 X3.3
A3: JP4.7 R12.2 X4.3
A4: JP5.7 R15.2 X5.3
A5: JP6.7 R18.2 X6.3
A6: JP7.7 R21.2 X7.3
A7: JP8.7 R24.2 X8.3
A8: JP9.7 R27.2 X9.3
A9: JP10.7 R30.2 X10.3
A10: JP11.7 R33.2 X11.3
A11: JP12.7 R36.2 X12.3
A12: JP13.7 R39.2 X13.3
A13: JP14.7 R42.2 X14.3
A14: JP15.7 R45.2 X15.3
A15: JP16.7 R48.2 X16.3
A16: JP17.7 R51.2 X17.3
A17: JP18.7 R54.2 X18.3
A18: JP19.7 R57.2 X19.3
A19: JP20.7 R60.2 X20.3
A20: JP21.7 R63.2 X21.3
A21: JP22.7 R66.2 X22.3
A22: JP23.7 R69.2 X23.3
A23: JP24.7 R72.2 X24.3
A24: JP25.7 R75.2 X25.3
A25: JP26.7 R78.2 X26.3
A26: JP27.7 R81.2 X27.3
A27: JP28.7 R84.2 X28.3
A28: JP29.7 R87.2 X29.3
A29: JP30.7 R90.2 X30.3
A30: JP31.7 R93.2 X31.3
A31: JP32.7 R96.2 X32.3
A32: JP33.7 R99.2 X33.3
A33: JP34.7 R102.2 X34.3
A34: JP35.7 R105.2 X35.3
A35: JP36.7 R108.2 X36.3
A36: JP37.7 R111.2 X37.3
A37: JP38.7 R114.2 X38.3
A38: JP39.7 R117.2 X39.3
A39: JP40.7 R120.2 X40.3
A40: JP41.7 R123.2 X41.3
A41: JP42.7 R126.2 X42.3
A42: JP43.7 R129.2 X43.3
A43: JP44.7 R132.2 X44.3
A44: JP45.7 R135.2 X45.3
A45: JP46.7 R138.2 X46.3
A46: JP47.7 R141.2 X47.3
A47: JP48.7 R144.2 X48.3
B: JP1.8 R4.2 X1.2
B1: JP2.8 R1.2 X2.2
B2: JP3.8 R7.2 X3.2
B3: JP4.8 R10.2 X4.2
B4: JP5.8 R13.2 X5.2
B5: JP6.8 R16.2 X6.2
B6: JP7.8 R19.2 X7.2
B7: JP8.8 R22.2 X8.2
B8: JP9.8 R25.2 X9.2
B9: JP10.8 R28.2 X10.2
B10: JP11.8 R31.2 X11.2
B11: JP12.8 R34.2 X12.2
B12: JP13.8 R37.2 X13.2
B13: JP14.8 R40.2 X14.2
B14: JP15.8 R43.2 X15.2
B15: JP16.8 R46.2 X16.2
B16: JP17.8 R49.2 X17.2
B17: JP18.8 R52.2 X18.2
B18: JP19.8 R55.2 X19.2
B19: JP20.8 R58.2 X20.2
B20: JP21.8 R61.2 X21.2
B21: JP22.8 R64.2 X22.2
B22: JP23.8 R67.2 X23.2
B23: JP24.8 R70.2 X24.2
B24: JP25.8 R73.2 X25.2
B25: JP26.8 R76.2 X26.2
B26: JP27.8 R79.2 X27.2
B27: JP28.8 R82.2 X28.2
B28: JP29.8 R85.2 X29.2
B29: JP30.8 R88.2 X30.2
B30: JP31.8 R91.2 X31.2
B31: JP32.8 R94.2 X32.2
B32: JP33.8 R97.2 X33.2
B33: JP34.8 R100.2 X34.2
B34: JP35.8 R103.2 X35.2
B35: JP36.8 R106.2 X36.2
B36: JP37.8 R109.2 X37.2
B37: JP38.8 R112.2 X38.2
B38: JP39.8 R115.2 X39.2
B39: JP40.8 R118.2 X40.2
B40: JP41.8 R121.2 X41.2
B41: JP42.8 R124.2 X42.2
B42: JP43.8 R127.2 X43.2
B43: JP44.8 R130.2 X44.2
B44: JP45.8 R133.2 X45.2
B45: JP46.8 R136.2 X46.2
B46: JP47.8 R139.2 X47.2
B47: JP48.8 R142.2 X48.2
GND: JP1.1 LED1.K LED2.K LED3.K X1.1
GND1: JP2.1 LED4.K LED5.K LED6.K X2.1
GND2: JP3.1 LED7.K LED8.K LED9.K X3.1
GND3: JP4.1 LED10.K LED11.K LED12.K X4.1
GND4: JP5.1 LED13.K LED14.K LED15.K X5.1
GND5: JP6.1 LED16.K LED17.K LED18.K X6.1
GND6: JP7.1 LED19.K LED20.K LED21.K X7.1
GND7: JP8.1 LED22.K LED23.K LED24.K X8.1
GND8: JP9.1 LED25.K LED26.K LED27.K X9.1
GND9: JP10.1 LED28.K LED29.K LED30.K X10.1
GND10: JP11.1 LED31.K LED32.K LED33.K X11.1
GND11: JP12.1 LED34.K LED35.K LED36.K X12.1
GND12: JP13.1 LED37.K LED38.K LED39.K X13.1
GND13: JP14.1 LED40.K LED41.K LED42.K X14.1
GND14: JP15.1 LED43.K LED44.K LED45.K X15.1
GND15: JP16.1 LED46.K LED47.K LED48.K X16.1
GND16: JP17.1 LED49.K LED50.K LED51.K X17.1
GND17: JP18.1 LED52.K LED53.K LED54.K X18.1
GND18: JP19.1 LED55.K LED56.K LED57.K X19.1
GND19: JP20.1 LED58.K LED59.K LED60.K X20.1
GND20: JP21.1 LED61.K LED62.K LED63.K X21.1
GND21: JP22.1 LED64.K LED65.K LED66.K X22.1
GND22: JP23.1 LED67.K LED68.K LED69.K X23.1
GND23: JP24.1 LED70.K LED71.K LED72.K X24.1
GND24: JP25.1 LED73.K LED74.K LED75.K X25.1
GND25: JP26.1 LED76.K LED77.K LED78.K X26.1
GND26: JP27.1 LED79.K LED80.K LED81.K X27.1
GND27: JP28.1 LED82.K LED83.K LED84.K X28.1
GND28: JP29.1 LED85.K LED86.K LED87.K X29.1
GND29: JP30.1 LED88.K LED89.K LED90.K X30.1
GND30: JP31.1 LED91.K LED92.K LED93.K X31.1
GND31: JP32.1 LED94.K LED95.K LED96.K X32.1
GND32: JP33.1 LED97.K LED98.K LED99.K X33.1
GND33: JP34.1 LED100.K LED101.K LED102.K X34.1
GND34: JP35.1 LED103.K LED104.K LED105.K X35.1
GND35: JP36.1 LED106.K LED107.K LED108.K X36.1
GND36: JP37.1 LED109.K LED110.K LED111.K X37.1
GND37: JP38.1 LED112.K LED113.K LED114.K X38.1
GND38: JP39.1 LED115.K LED116.K LED117.K X39.1
GND39: JP40.1 LED118.K LED119.K LED120.K X40.1
GND40: JP41.1 LED121.K LED122.K LED123.K X41.1
GND41: JP42.1 LED124.K LED125.K LED126.K X42.1
GND42: JP43.1 LED127.K LED128.K LED129.K X43.1
GND43: JP44.1 LED130.K LED131.K LED132.K X44.1
GND44: JP45.1 LED133.K LED134.K LED135.K X45.1
GND45: JP46.1 LED136.K LED137.K LED138.K X46.1
GND46: JP47.1 LED139.K LED140.K LED141.K X47.1
GND47: JP48.1 LED142.K LED143.K LED144.K X48.1
N$1: D1.A X1.4
N$2: LED6.A R2.1
N$3: LED5.A R3.1
N$4: LED4.A R1.1
N$5: D2.A X2.4
N$6: LED3.A R5.1
N$7: LED2.A R6.1
N$8: LED1.A R4.1
N$9: LED9.A R8.1
N$10: LED8.A R9.1
N$11: LED7.A R7.1
N$12: D3.A X3.4
N$13: LED12.A R11.1
N$14: LED11.A R12.1
N$15: LED10.A R10.1
N$16: D4.A X4.4
N$17: LED15.A R14.1
N$18: LED14.A R15.1
N$19: LED13.A R13.1
N$20: D5.A X5.4
N$21: LED18.A R17.1
N$22: LED17.A R18.1
N$23: LED16.A R16.1
N$24: D6.A X6.4
N$25: LED21.A R20.1
N$26: LED20.A R21.1
N$27: LED19.A R19.1
N$28: D7.A X7.4
N$29: LED24.A R23.1
N$30: LED23.A R24.1
N$31: LED22.A R22.1
N$32: D8.A X8.4
N$33: LED27.A R26.1
N$34: LED26.A R27.1
N$35: LED25.A R25.1
N$36: D9.A X9.4
N$37: LED30.A R29.1
N$38: LED29.A R30.1
N$39: LED28.A R28.1
N$40: D10.A X10.4
N$41: LED33.A R32.1
N$42: LED32.A R33.1
N$43: LED31.A R31.1
N$44: D11.A X11.4
N$45: LED36.A R35.1
N$46: LED35.A R36.1
N$47: LED34.A R34.1
N$48: D12.A X12.4
N$49: LED39.A R38.1
N$50: LED38.A R39.1
N$51: LED37.A R37.1
N$52: D13.A X13.4
N$53: LED42.A R41.1
N$54: LED41.A R42.1
N$55: LED40.A R40.1
N$56: D14.A X14.4
N$57: LED45.A R44.1
N$58: LED44.A R45.1
N$59: LED43.A R43.1
N$60: D15.A X15.4
N$61: LED48.A R47.1
N$62: LED47.A R48.1
N$63: LED46.A R46.1
N$64: D16.A X16.4
N$65: LED51.A R50.1
N$66: LED50.A R51.1
N$67: LED49.A R49.1
N$68: D17.A X17.4
N$69: LED54.A R53.1
N$70: LED53.A R54.1
N$71: LED52.A R52.1
N$72: D18.A X18.4
N$73: LED57.A R56.1
N$74: LED56.A R57.1
N$75: LED55.A R55.1
N$76: D19.A X19.4
N$77: LED60.A R59.1
N$78: LED59.A R60.1
N$79: LED58.A R58.1
N$80: D20.A X20.4
N$81: LED63.A R62.1
N$82: LED62.A R63.1
N$83: LED61.A R61.1
N$84: D21.A X21.4
N$85: LED66.A R65.1
N$86: LED65.A R66.1
N$87: LED64.A R64.1
N$88: D22.A X22.4
N$89: LED69.A R68.1
N$90: LED68.A R69.1
N$91: LED67.A R67.1
N$92: D23.A X23.4
N$93: LED72.A R71.1
N$94: LED71.A R72.1
N$95: LED70.A R70.1
N$96: D24.A X24.4
N$97: LED75.A R74.1
N$98: LED74.A R75.1
N$99: LED73.A R73.1
N$100: D25.A X25.4
N$101: LED78.A R77.1
N$102: LED77.A R78.1
N$103: LED76.A R76.1
N$104: D26.A X26.4
N$105: LED81.A R80.1
N$106: LED80.A R81.1
N$107: LED79.A R79.1
N$108: D27.A X27.4
N$109: LED84.A R83.1
N$110: LED83.A R84.1
N$111: LED82.A R82.1
N$112: D28.A X28.4
N$113: LED87.A R86.1
N$114: LED86.A R87.1
N$115: LED85.A R85.1
N$116: D29.A X29.4
N$117: LED90.A R89.1
N$118: LED89.A R90.1
N$119: LED88.A R88.1
N$120: D30.A X30.4
N$121: LED93.A R92.1
N$122: LED92.A R93.1
N$123: LED91.A R91.1
N$124: D31.A X31.4
N$125: LED96.A R95.1
N$126: LED95.A R96.1
N$127: LED94.A R94.1
N$128: D32.A X32.4
N$129: LED99.A R98.1
N$130: LED98.A R99.1
N$131: LED97.A R97.1
N$132: D33.A X33.4
N$133: LED102.A R101.1
N$134: LED101.A R102.1
N$135: LED100.A R100.1
N$136: D34.A X34.4
N$137: LED105.A R104.1
N$138: LED104.A R105.1
N$139: LED103.A R103.1
N$140: D35.A X35.4
N$141: LED108.A R107.1
N$142: LED107.A R108.1
N$143: LED106.A R106.1
N$144: D36.A X36.4
N$145: LED111.A R110.1
N$146: LED110.A R111.1
N$147: LED109.A R109.1
N$148: D37.A X37.4
N$149: LED114.A R113.1
N$150: LED113.A R114.1
N$151: LED112.A R112.1
N$152: D38.A X38.4
N$153: LED117.A R116.1
N$154: LED116.A R117.1
N$155: LED115.A R115.1
N$156: D39.A X39.4
N$157: LED120.A R119.1
N$158: LED119.A R120.1
N$159: LED118.A R118.1
N$160: D40.A X40.4
N$161: LED123.A R122.1
N$162: LED122.A R123.1
N$163: LED121.A R121.1
N$164: D41.A X41.4
N$165: LED126.A R125.1
N$166: LED125.A R126.1
N$167: LED124.A R124.1
N$168: D42.A X42.4
N$169: LED129.A R128.1
N$170: LED128.A R129.1
N$171: LED127.A R127.1
N$172: D43.A X43.4
N$173: LED132.A R131.1
N$174: LED131.A R132.1
N$175: LED130.A R130.1
N$176: D44.A X44.4
N$177: LED135.A R134.1
N$178: LED134.A R135.1
N$179: LED133.A R133.1
N$180: D45.A X45.4
N$181: LED138.A R137.1
N$182: LED137.A R138.1
N$183: LED136.A R136.1
N$184: D46.A X46.4
N$185: LED141.A R140.1
N$186: LED140.A R141.1
N$187: LED139.A R139.1
N$188: D47.A X47.4
N$189: LED144.A R143.1
N$190: LED143.A R144.1
N$191: LED142.A R142.1
N$192: D48.A X48.4
N$193: JP49.1 X49.1
N$194: JP49.4 X49.4
N$195: JP49.2 X49.2
N$196: JP49.3 X49.3
N$197: JP50.1 X50.1
N$198: JP50.4 X50.4
N$199: JP50.2 X50.2
N$200: JP50.3 X50.3
N$201: JP51.1 X51.1
N$202: JP51.4 X51.4
N$203: JP51.2 X51.2
N$204: JP51.3 X51.3
N$205: JP52.1 X52.1
N$206: JP52.4 X52.4
N$207: JP52.2 X52.2
N$208: JP52.3 X52.3
N$209: JP53.1 X53.1
N$210: JP53.4 X53.4
N$211: JP53.2 X53.2
N$212: JP53.3 X53.3
N$213: JP54.1 X54.1
N$214: JP54.4 X54.4
N$215: JP54.2 X54.2
N$216: JP54.3 X54.3
N$217: JP55.1 X55.1
N$218: JP55.4 X55.4
N$219: JP55.2 X55.2
N$220: JP55.3 X55.3
N$221: JP56.1 X56.1
N$222: JP56.4 X56.4
N$223: JP56.2 X56.2
N$224: JP56.3 X56.3
N$225: JP57.1 X57.1
N$226: JP57.4 X57.4
N$227: JP57.2 X57.2
N$228: JP57.3 X57.3
N$229: JP58.1 X58.1
N$230: JP58.4 X58.4
N$231: JP58.2 X58.2
N$232: JP58.3 X58.3
N$233: JP59.1 X59.1
N$234: JP59.4 X59.4
N$235: JP59.2 X59.2
N$236: JP59.3 X59.3
N$237: JP60.1 X60.1
N$238: JP60.4 X60.4
N$239: JP60.2 X60.2
N$240: JP60.3 X60.3
N$241: JP61.1 X61.1
N$242: JP61.4 X61.4
N$243: JP61.2 X61.2
N$244: JP61.3 X61.3
N$245: JP62.1 X62.1
N$246: JP62.4 X62.4
N$247: JP62.2 X62.2
N$248: JP62.3 X62.3
N$249: JP63.1 X63.1
N$250: JP63.4 X63.4
N$251: JP63.2 X63.2
N$252: JP63.3 X63.3
N$253: JP64.1 X64.1
N$254: JP64.4 X64.4
N$255: JP64.2 X64.2
N$256: JP64.3 X64.3
N$257: JP65.1 X65.1
N$258: JP65.4 X65.4
N$259: JP65.2 X65.2
N$260: JP65.3 X65.3
N$261: JP66.1 X66.1
N$262: JP66.4 X66.4
N$263: JP66.2 X66.2
N$264: JP66.3 X66.3
N$265: JP67.1 X67.1
N$266: JP67.4 X67.4
N$267: JP67.2 X67.2
N$268: JP67.3 X67.3
N$269: JP68.1 X68.1
N$270: JP68.4 X68.4
N$271: JP68.2 X68.2
N$272: JP68.3 X68.3
N$273: JP69.1 X69.1
N$274: JP69.4 X69.4
N$275: JP69.2 X69.2
N$276: JP69.3 X69.3
N$277: JP70.1 X70.1
N$278: JP70.4 X70.4
N$279: JP70.2 X70.2
N$280: JP70.3 X70.3
N$281: JP71.1 X71.1
N$282: JP71.4 X71.4
N$283: JP71.2 X71.2
N$284: JP71.3 X71.3
N$285: JP72.1 X72.1
N$286: JP72.4 X72.4
N$287: JP72.2 X72.2
N$288: JP72.3 X72.3
N$289: JP73.1 X73.1
N$290: JP73.4 X73.4
N$291: JP73.2 X73.2
N$292: JP73.3 X73.3
N$293: JP74.1 X74.1
N$294: JP74.4 X74.4
N$295: JP74.2 X74.2
N$296: JP74.3 X74.3
N$297: JP75.1 X75.1
N$298: JP75.4 X75.4
N$299: JP75.2 X75.2
N$300: JP75.3 X75.3
N$301: JP76.1 X76.1
N$302: JP76.4 X76.4
N$303: JP76.2 X76.2
N$304: JP76.3 X76.3
N$305: JP77.1 X77.1
N$306: JP77.4 X77.4
N$307: JP77.2 X77.2
N$308: JP77.3 X77.3
N$309: JP78.1 X78.1
N$310: JP78.4 X78.4
N$311: JP78.2 X78.2
N$312: JP78.3 X78.3
N$313: JP79.1 X79.1
N$314: JP79.4 X79.4
N$315: JP79.2 X79.2
N$316: JP79.3 X79.3
N$317: JP80.1 X80.1
N$318: JP80.4 X80.4
N$319: JP80.2 X80.2
N$320: JP80.3 X80.3
VCC: D1.C JP1.2 JP1.5 JP1.6 R5.2
VCC1: D2.C JP2.2 JP2.5 JP2.6 R2.2
VCC2: D3.C JP3.2 JP3.5 JP3.6 R8.2
VCC3: D4.C JP4.2 JP4.5 JP4.6 R11.2
VCC4: D5.C JP5.2 JP5.5 JP5.6 R14.2
VCC5: D6.C JP6.2 JP6.5 JP6.6 R17.2
VCC6: D7.C JP7.2 JP7.5 JP7.6 R20.2
VCC7: D8.C JP8.2 JP8.5 JP8.6 R23.2
VCC8: D9.C JP9.2 JP9.5 JP9.6 R26.2
VCC9: D10.C JP10.2 JP10.5 JP10.6 R29.2
VCC10: D11.C JP11.2 JP11.5 JP11.6 R32.2
VCC11: D12.C JP12.2 JP12.5 JP12.6 R35.2
VCC12: D13.C JP13.2 JP13.5 JP13.6 R38.2
VCC13: D14.C JP14.2 JP14.5 JP14.6 R41.2
VCC14: D15.C JP15.2 JP15.5 JP15.6 R44.2
VCC15: D16.C JP16.2 JP16.5 JP16.6 R47.2
VCC16: D17.C JP17.2 JP17.5 JP17.6 R50.2
VCC17: D18.C JP18.2 JP18.5 JP18.6 R53.2
VCC18: D19.C JP19.2 JP19.5 JP19.6 R56.2
VCC19: D20.C JP20.2 JP20.5 JP20.6 R59.2
VCC20: D21.C JP21.2 JP21.5 JP21.6 R62.2
VCC21: D22.C JP22.2 JP22.5 JP22.6 R65.2
VCC22: D23.C JP23.2 JP23.5 JP23.6 R68.2
VCC23: D24.C JP24.2 JP24.5 JP24.6 R71.2
VCC24: D25.C JP25.2 JP25.5 JP25.6 R74.2
VCC25: D26.C JP26.2 JP26.5 JP26.6 R77.2
VCC26: D27.C JP27.2 JP27.5 JP27.6 R80.2
VCC27: D28.C JP28.2 JP28.5 JP28.6 R83.2
VCC28: D29.C JP29.2 JP29.5 JP29.6 R86.2
VCC29: D30.C JP30.2 JP30.5 JP30.6 R89.2
VCC30: D31.C JP31.2 JP31.5 JP31.6 R92.2
VCC31: D32.C JP32.2 JP32.5 JP32.6 R95.2
VCC32: D33.C JP33.2 JP33.5 JP33.6 R98.2
VCC33: D34.C JP34.2 JP34.5 JP34.6 R101.2
VCC34: D35.C JP35.2 JP35.5 JP35.6 R104.2
VCC35: D36.C JP36.2 JP36.5 JP36.6 R107.2
VCC36: D37.C JP37.2 JP37.5 JP37.6 R110.2
VCC37: D38.C JP38.2 JP38.5 JP38.6 R113.2
VCC38: D39.C JP39.2 JP39.5 JP39.6 R116.2
VCC39: D40.C JP40.2 JP40.5 JP40.6 R119.2
VCC40: D41.C JP41.2 JP41.5 JP41.6 R122.2
VCC41: D42.C JP42.2 JP42.5 JP42.6 R125.2
VCC42: D43.C JP43.2 JP43.5 JP43.6 R128.2
VCC43: D44.C JP44.2 JP44.5 JP44.6 R131.2
VCC44: D45.C JP45.2 JP45.5 JP45.6 R134.2
VCC45: D46.C JP46.2 JP46.5 JP46.6 R137.2
VCC46: D47.C JP47.2 JP47.5 JP47.6 R140.2
VCC47: D48.C JP48.2 JP48.5 JP48.6 R143.2